# EAGLE board Jalosie4.2 (EAGLE 5.00)
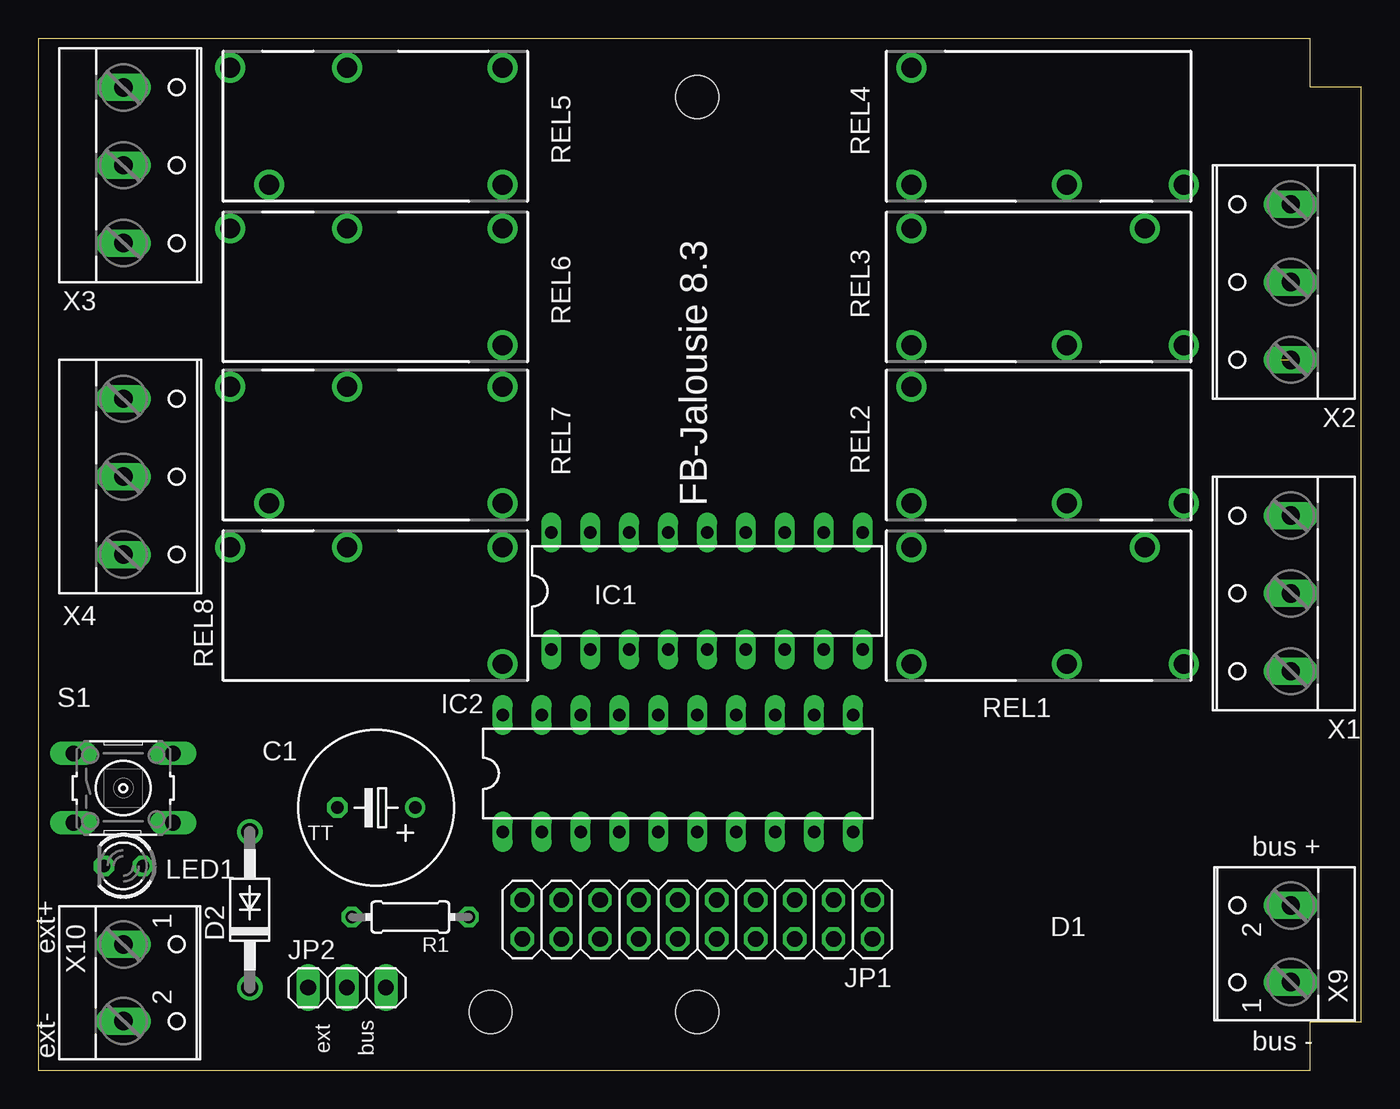
[diagram p0: board, top side]
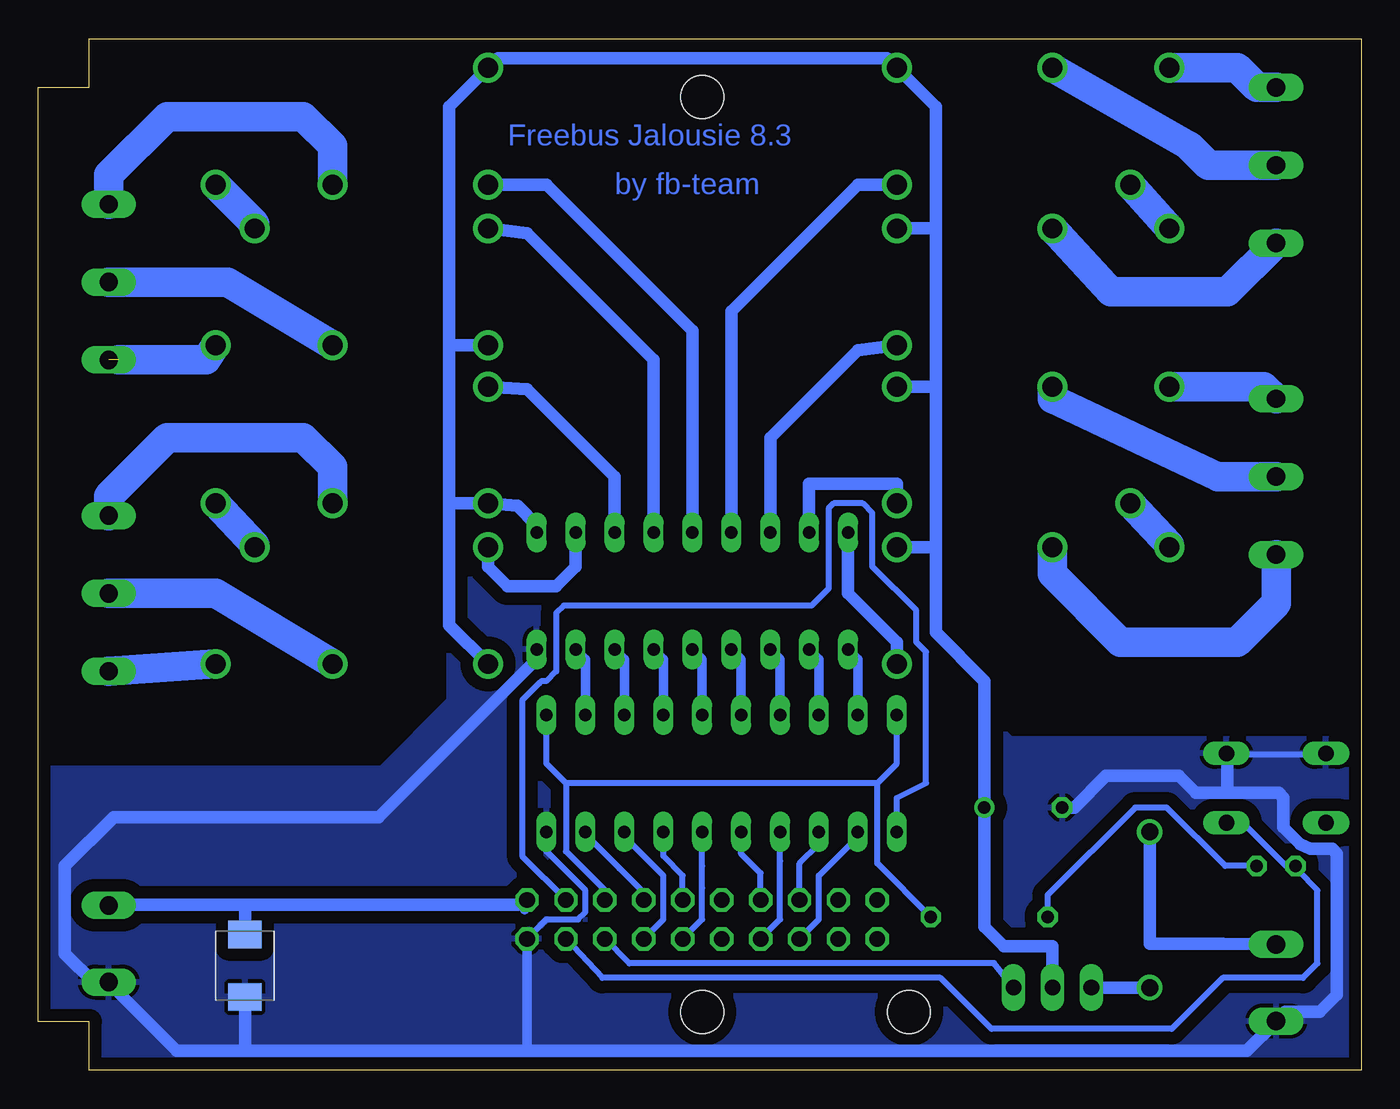
[diagram p1: board, bottom side, seen from below]

Size 86.35 x 67.31 mm. Coordinates in mm from the lower left corner, seen from the top.
Outline: 0,0.01 83.02,0 83.02,3.18 86.35,3.18 86.35,64.13 83.02,64.13 83.02,67.31 0,67.31 0,0.01
Copper layers (1*16): Top 0.035mm / dielectric 1.5mm / Bottom 0.035mm
Design rules "default *": minimum track width 10mil, minimum drill 24mil, track to track 16mil, track to pad 16mil, pad to pad 16mil, via to via 16mil, smd to smd 8mil, copper to edge 20mil, drill to drill 10mil, minimum pad ring 10mil, minimum via ring 8mil, stop-mask expansion 4mil, vias tented up to drill 0mil, thermal gap 10mil
Holes 2.8 mm at 43.02,3.81 43.02,63.5 29.52,3.81

## Footprints (pad centres in the part's own frame; a part is rotated, then mirrored left to right if it is on the bottom)
TT5D10 = drill 0.813 round: + -2.54,0 | drill 0.813 octagon: - 2.54,0
SMBJ = smd 1.78 x 2.16: A 2.04,0; C -2.03,0
DO41-10 = drill 1.118 round: A 5.08,0; C -5.08,0
DIL18 = drill 0.813 long: 1 -10.16,-3.81; 2 -7.62,-3.81; 3 -5.08,-3.81; 4 -2.54,-3.81; 5 0,-3.81; 6 2.54,-3.81; 7 5.08,-3.81; 8 7.62,-3.81; 9 10.16,-3.81; 10 10.16,3.81; 11 7.62,3.81; 12 5.08,3.81; 13 2.54,3.81; 14 0,3.81; 15 -2.54,3.81; 16 -5.08,3.81; 17 -7.62,3.81; 18 -10.16,3.81
DIL20 = drill 0.813 long: 1 -11.43,-3.81; 2 -8.89,-3.81; 3 -6.35,-3.81; 4 -3.81,-3.81; 5 -1.27,-3.81; 6 1.27,-3.81; 7 3.81,-3.81; 8 6.35,-3.81; 9 8.89,-3.81; 10 11.43,-3.81; 11 11.43,3.81; 12 8.89,3.81; 13 6.35,3.81; 14 3.81,3.81; 15 1.27,3.81; 16 -1.27,3.81; 17 -3.81,3.81; 18 -6.35,3.81; 19 -8.89,3.81; 20 -11.43,3.81
2X10 = drill 1.016 octagon: 1 -11.43,-1.27; 2 -11.43,1.27; 3 -8.89,-1.27; 4 -8.89,1.27; 5 -6.35,-1.27; 6 -6.35,1.27; 7 -3.81,-1.27; 8 -3.81,1.27; 9 -1.27,-1.27; 10 -1.27,1.27; 11 1.27,-1.27; 12 1.27,1.27; 13 3.81,-1.27; 14 3.81,1.27; 15 6.35,-1.27; 16 6.35,1.27; 17 8.89,-1.27; 18 8.89,1.27; 19 11.43,-1.27; 20 11.43,1.27
1X03 = drill 1.016 long: 1 -2.54,0; 2 0,0; 3 2.54,0
LED3MM = drill 0.813 octagon: A -1.27,0; K 1.27,0
0204/7 = drill 0.813 octagon: 1 -3.81,0; 2 3.81,0
G5Q_1_EU = drill 1.3 round: 11 1.27,-3.81; 12 6.35,3.81; 14 8.89,-3.81; A1 -8.89,-3.81; A2 -8.89,3.81
RE-SCHRACK = drill 1.3 round: 11 8.89,-3.81; 14 1.27,-3.81; A1 -8.89,-3.81; A2 -8.89,3.81
B3F-10XX = drill 1.016 long: 1 -3.251,2.261; 2 3.251,2.261; 3 -3.251,-2.261; 4 3.251,-2.261
W237-133 = drill 1.194 long: 1 -5.08,-0.635; 2 0,-0.635; 3 5.08,-0.635
W237-102 = drill 1.194 long: 1 -2.5,-1.27; 2 2.5,-1.27

## Placement (x,y rotation side)
C1  220µ 63V  [TT5D10]  22.06,17.14 180 top
D1  SMAJ40CA  [SMBJ]  72.86,6.83 270 bottom
D2  1N4007  [DO41-10]  13.8,10.48 90 top
IC1  ULN2803  [DIL18]  43.65,31.27 0 top
IC2  74HC573N  [DIL20]  41.75,19.37 0 top
JP1  [2X10]  43.02,9.84 180 top
JP2  [1X03]  20.16,5.4 0 top
LED1  rot  [LED3MM]  5.55,13.34 180 top
R1  1k  [0204/7]  24.28,10 180 top
REL1  RE03U  [G5Q_1_EU]  65.88,30.32 0 top
REL2  G5Q-1A  [RE-SCHRACK]  65.88,40.8 0 top
REL3  RE03U  [G5Q_1_EU]  65.88,51.12 0 top
REL4  G5Q-1A  [RE-SCHRACK]  65.88,61.6 0 top
REL5  RE03U  [G5Q_1_EU]  21.43,61.6 180 top
REL6  G5Q-1A  [RE-SCHRACK]  21.43,51.12 180 top
REL7  RE03U  [G5Q_1_EU]  21.43,40.8 180 top
REL8  G5Q-1A  [RE-SCHRACK]  21.43,30.32 180 top
S1  push Prog  [B3F-10XX]  5.55,18.41 0 top
X1  [W237-133]  81.12,31.11 90 top
X2  [W237-133]  81.12,51.44 90 top
X3  [W237-133]  6.18,59.05 270 top
X4  [W237-133]  6.18,38.73 270 top
X9  [W237-102]  80.48,8.26 90 top
X10  [W237-102]  6.82,5.71 270 top

## Library data of the parts
C1 R1 = rcl
D1 D2 = diode
IC1 = uln-udn
IC2 = 74xx-eu
JP1 JP2 = pinhead
LED1 = led
REL1 REL3 REL5 REL7 = freebus_relay
REL2 REL4 REL6 REL8 = relay
S1 = switch-omron
X1-X4 = con-wago-508
X9 X10 = con-wago-500

## Nets
GND: C1.- D1.A IC1.9 IC2.10 JP1.2 S1.1 S1.2 X9.1 X10.2
IO1: IC2.2 JP1.16
IO2: IC2.3 JP1.15
IO3: IC2.4 JP1.14
IO4: IC2.5 JP1.13
IO5: IC2.6 JP1.10
IO6: IC2.7 JP1.9
IO7: IC2.8 JP1.8
IO8: IC2.9 JP1.7
N$1: REL3.12 REL4.11
N$2: REL4.14 X2.3
N$3: REL1.12 REL2.11
N$4: REL1.11 X1.2
N$5: REL3.11 X2.2
N$6: REL2.14 X1.3
N$7: REL7.11 X4.2
N$8: REL5.11 X3.2
N$9: REL1.14 X1.1
N$10: REL5.12 REL6.11
N$11: JP1.4 LED1.K S1.4
N$12: LED1.A R1.2
N$13: REL3.14 X2.1
N$14: REL6.14 X3.3
N$15: REL8.14 X4.3
N$16: REL7.14 X4.1
N$17: D2.A X10.1
N$18: JP1.6 JP2.3
N$19: REL5.14 X3.1
N$20: D1.C JP1.1 X9.2
N$21: IC1.1 IC2.19
N$22: IC1.2 IC2.18
N$23: IC1.3 IC2.17
N$24: IC1.4 IC2.16
N$25: IC1.5 IC2.15
N$27: IC1.6 IC2.14
N$28: IC1.7 IC2.13
N$29: IC1.8 IC2.12
N$30: REL7.12 REL8.11
N$31: D2.C JP2.1
N$33: IC2.1 JP1.3
R1: IC1.14 REL4.A1
R2: IC1.13 REL3.A2
R3: IC1.12 REL2.A2
R4: IC1.11 REL1.A2
R5: IC1.15 REL5.A2
R6: IC1.16 REL6.A2
R7: IC1.17 REL7.A2
R8: IC1.18 REL8.A2
VCC: IC2.11 IC2.20 JP1.5 R1.1
VDD: C1.+ IC1.10 JP2.2 REL1.A1 REL2.A1 REL3.A1 REL4.A2 REL5.A1 REL6.A1 REL7.A1 REL8.A1

## Tracks (layer width: path | path; a pad name or v marks a point on that pad's centre or on a via)
GND
  Bottom 0.406: 53.81,26.83 IC1.9 | JP1.2 53.18,9.84 51.11,9.84 50.64,10.32 50.64,11.75 53.18,14.29 IC2.10 | S1.2 8.76,20.64 2.34,20.64 S1.1
  Bottom 0.61: 81.75,5.72 X9.1 | 54.45,1.27 JP1.2
  Bottom 0.813: 72.86,1.27 54.45,1.27 7.46,1.27 5.55,3.18 X10.2 4.96,3.81 2.69,3.81 1.58,4.92 1.58,14.13 1.9,14.45 3.33,14.45 3.96,14.76 5.07,15.88 5.07,17.78 5.39,18.1 8.73,18.1 | 72.86,1.27 77.31,1.27 81.75,5.72 82.7,5.72 84.61,7.62 84.61,13.34 81.43,16.51 64.13,16.51 53.81,26.83 | 72.86,1.27 D1.A | 8.73,18.1 10.79,18.1 10.79,18.12 11.92,19.21 16.66,19.21 18.73,17.15 C1.- | S1.2 8.73,20.6 8.73,18.1
  pour Bottom (isolate 0.813): 0.47,0.64 0.47,20.95 1.1,21.59 22.85,21.59 27.62,26.35 27.62,27.3 27.77,62.87 30.95,66.04 56.35,66.04 59.53,62.87 59.53,24.13 63.97,19.68 86.04,19.68 86.04,0.64
IO1
  Bottom 0.406: JP1.16 35.4,9.84 35.4,12.7 32.86,15.24 IC2.2
IO2
  Bottom 0.406: IC2.3 35.4,14.76 36.67,13.49 JP1.15
IO3
  Bottom 0.406: IC2.4 37.94,13.65 37.94,9.84 JP1.14
IO4
  Bottom 0.406: IC2.5 40.48,14.13 39.21,12.86 39.21,10.8 39.36,10.64 JP1.13
IO5
  Bottom 0.406: IC2.6 43.02,13.34 43.02,11.91 43.02,9.84 JP1.10
IO6
  Bottom 0.406: IC2.7 45.56,13.97 44.29,12.7 JP1.9
IO7
  Bottom 0.406: IC2.8 48.1,15.24 45.56,12.7 45.56,9.84 JP1.8
IO8
  Bottom 0.406: IC2.9 50.64,15.4 48.41,13.18 46.83,11.59 JP1.7
N$1
  Bottom 1.93: REL4.11 72.23,55.25 REL3.12
N$2
  Bottom 1.93: REL4.14 67.15,60.33 69.05,62.23 77.94,62.23 81.75,58.42 X2.3
N$3
  Bottom 1.93: REL1.12 72.23,34.29 REL2.11
N$4
  Bottom 1.93: X1.2 74.77,31.12 REL1.11
N$5
  Bottom 1.93: REL3.11 73.97,51.44 X2.2
N$6
  Bottom 1.93: REL2.14 67.15,39.37 69.05,41.28 77.94,41.28 81.75,37.47 X1.3
N$7
  Bottom 1.93: X4.2 9.36,38.74 20.16,43.82 REL7.11
N$8
  Bottom 1.93: X3.2 10,59.06 11.27,60.33 REL5.11
N$9
  Bottom 1.93: REL1.14 X1.1
N$10
  Bottom 1.93: REL6.11 REL5.12
N$11
  Bottom 0.406: JP1.4 49.52,6.03 27.46,6.03 24.12,2.7 12.38,2.7 9.04,6.03 3.8,6.03 2.85,6.99 2.85,11.75 4.12,13.02 4.92,13.34 | 4.92,13.34 LED1.K | S1.4 8.76,16.19 7.77,16.19 4.92,13.34
N$12
  Bottom 0.406: R1.2 20.47,11.43 14.76,17.15 12.69,17.15 8.88,13.34 LED1.A
N$13  (1 unrouted)
  Bottom 1.93: REL3.14 75.4,46.36 81.12,46.36
N$14
  Bottom 1.93: X3.3 8.73,50.8 16.35,50.8 REL6.14
N$15
  Bottom 1.93: X4.3 5.55,30.48 8.09,27.94 15.71,27.94 20.16,32.39 REL8.14
N$16
  Bottom 1.93: X4.1 6.34,44.61 REL7.14
N$17
  Bottom 0.813: X10.1 9.04,8.26 13.81,8.26 D2.A
N$18
  Bottom 0.406: JP2.3 23.97,6.99 47.78,6.99 | 47.78,6.99 | 47.78,6.99 JP1.6
N$19
  Bottom 1.93: X3.1 6.82,64.14 8.09,65.41 REL5.14
N$20
  Bottom 0.254: X9.2 81.75,10.8
  Bottom 0.61: 80.44,10.76 80.48,10.76 80.48,10.8 | 54.76,10.8 54.6,10.48 JP1.1
  Bottom 0.813: 80.48,10.76 X9.2 | 54.76,10.8 72.86,10.8 | 72.86,10.8 80.48,10.8 | 72.86,10.8 D1.C
N$21
  Bottom 0.61: IC2.19 | IC1.1 32.86,26.83 IC2.19
N$22
  Bottom 0.61: IC2.18 | IC1.2 35.4,26.83 IC2.18
N$23
  Bottom 0.61: IC2.17 | IC1.3 37.94,26.83 IC2.17
N$24
  Bottom 0.61: IC2.16 | IC1.4 40.48,26.83 IC2.16
N$25
  Bottom 0.61: IC2.15 | IC1.5 43.02,26.83 IC2.15
N$27
  Bottom 0.61: IC2.14 | IC1.6 45.56,26.83 IC2.14
N$28
  Bottom 0.61: IC2.13 | IC1.7 48.1,26.83 IC2.13
N$29
  Bottom 0.61: IC2.12 | IC1.8 50.64,26.83 IC2.12
N$30
  Bottom 1.93: REL8.11 12.54,34.29 REL7.12
N$31
  Bottom 0.813: D2.C JP2.1
N$33
  Bottom 0.406: JP1.3 54.76,13.97 54.76,24.13 53.65,25.24 53.49,25.4 53.18,25.4 52.54,26.04 52.54,29.85 52.06,30.32 35.87,30.32 34.76,31.43 34.76,36.67 34.44,36.99 32.54,36.99 31.9,36.35 31.9,32.86 29.05,30 29.05,27.94 28.41,27.31 28.41,18.73 30.32,17.78 IC2.1
R1
  Bottom 0.813: REL4.A1 53.18,57.79 43.65,48.26 IC1.14
R2
  Bottom 0.813: IC1.13 46.19,46.36 54.45,54.61 REL3.A2
R3
  Bottom 0.813: REL2.A2 54.45,44.45 48.73,38.74 IC1.12
R4
  Bottom 0.813: IC1.11 51.27,32.86 52.54,31.59 55.72,31.59 56.99,32.86 REL1.A2
R5
  Bottom 0.813: IC1.15 41.11,49.53 32.86,57.79 REL5.A2
R6
  Bottom 0.813: REL6.A2 32.86,46.99 38.57,41.28 IC1.16
R7
  Bottom 0.813: IC1.17 36.03,38.26 30.32,38.26 REL7.A2
R8
  Bottom 0.813: REL8.A2 30.32,27.94 33.49,31.12 IC1.18
VCC
  Bottom 0.406: IC2.20 30.32,20 31.59,18.73 | 31.59,18.73 51.91,18.73 | 51.91,18.73 53.18,20 IC2.11 | JP1.5 49.37,11.75 51.91,14.29 51.91,18.73 | 31.59,18.73 | R1.1 31.59,13.49 31.59,18.73
VDD
  Bottom 0.813: 27.78,34.13 REL8.A1 | 27.78,34.13 27.78,44.61 | 27.78,44.61 27.78,54.93 | 27.78,54.93 REL6.A1 | 27.78,54.93 27.78,62.87 REL5.A1 30.95,66.04 56.35,66.04 REL4.A2 59.53,62.87 59.53,47.31 | 59.53,47.31 59.53,36.99 | 59.53,36.99 59.53,29.05 REL1.A1 | 59.53,36.99 REL2.A1 55.08,36.83 53.81,35.56 IC1.10 | 27.78,44.61 REL7.A1 | 59.53,47.31 REL3.A1 | JP2.2 20.16,8.1 23.33,8.1 24.6,9.37 C1.+ 24.6,25.4 27.78,28.58 27.78,34.13

## Text on the board
Bottom: Freebus Jalousie 8.3 | by fb-team
tPlace: FB-Jalousie 8.3 | bus + | ext+ | ext- | ext | bus | bus -